# Altium PCB Top_board.PcbDoc (part 1 of 2)
Units mm, origin at the board's own origin, x right, y up, seen from the top; angles counter-clockwise.
Board outline 102 x 58.5 mm, 2 copper layers (Top Layer, Bottom Layer); 127 components, 87 nets, 328 pads, 86 vias.
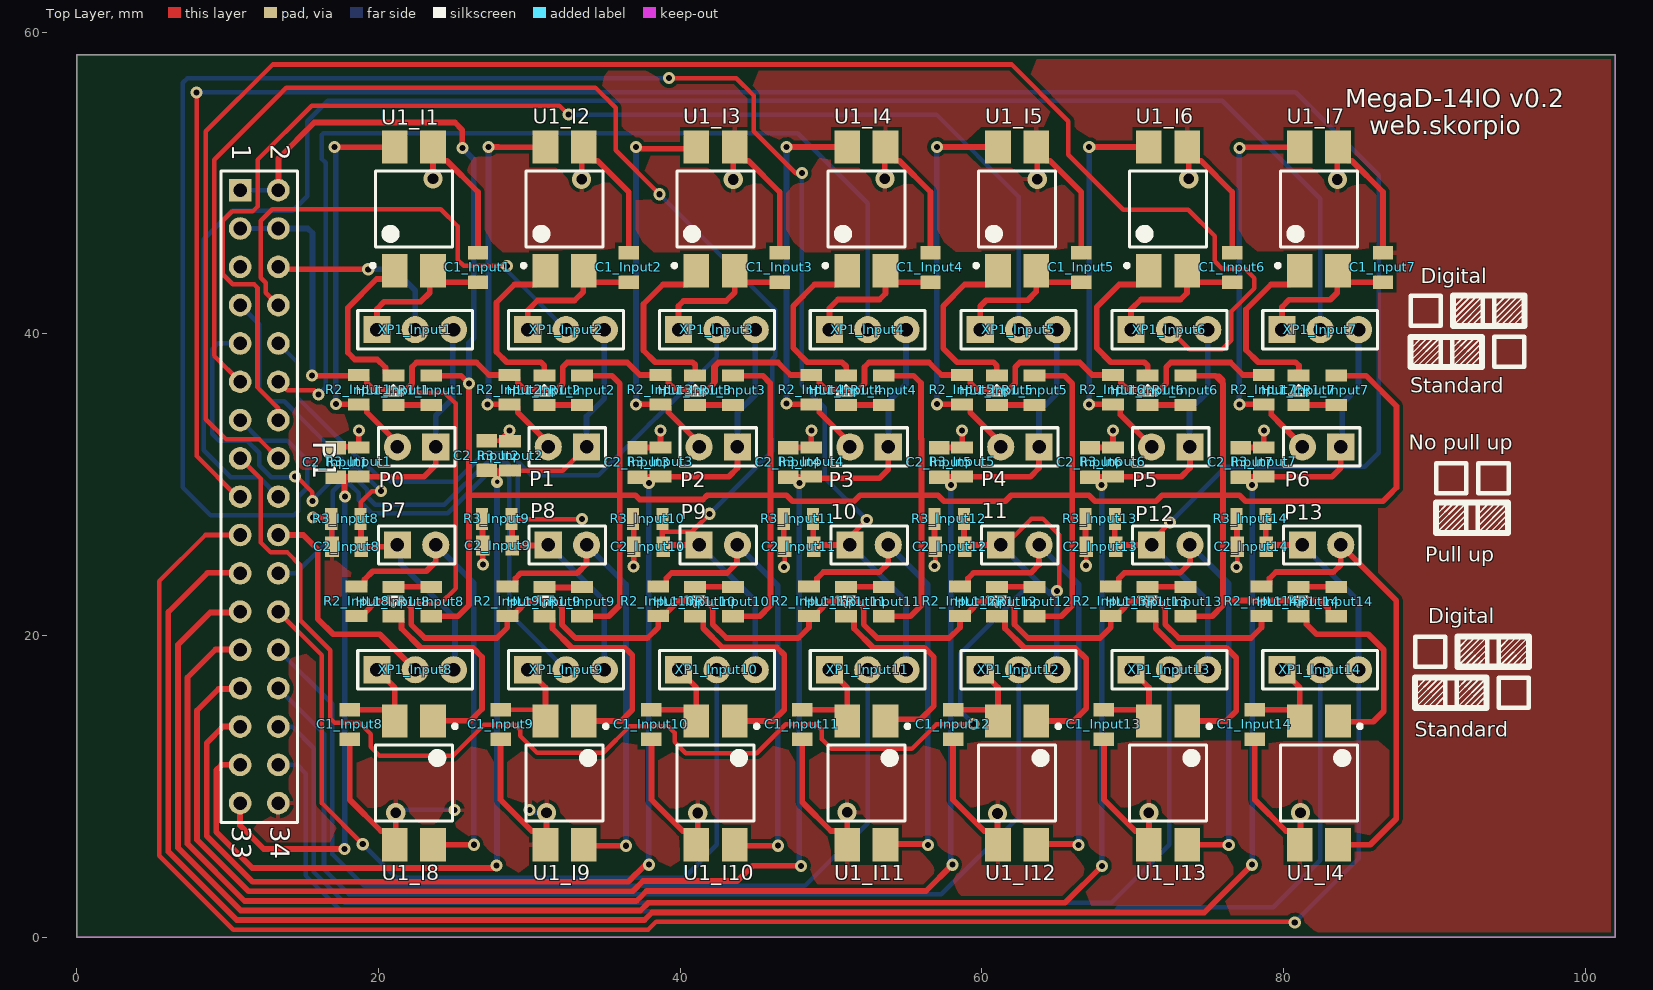
[diagram p0: Top Layer view]
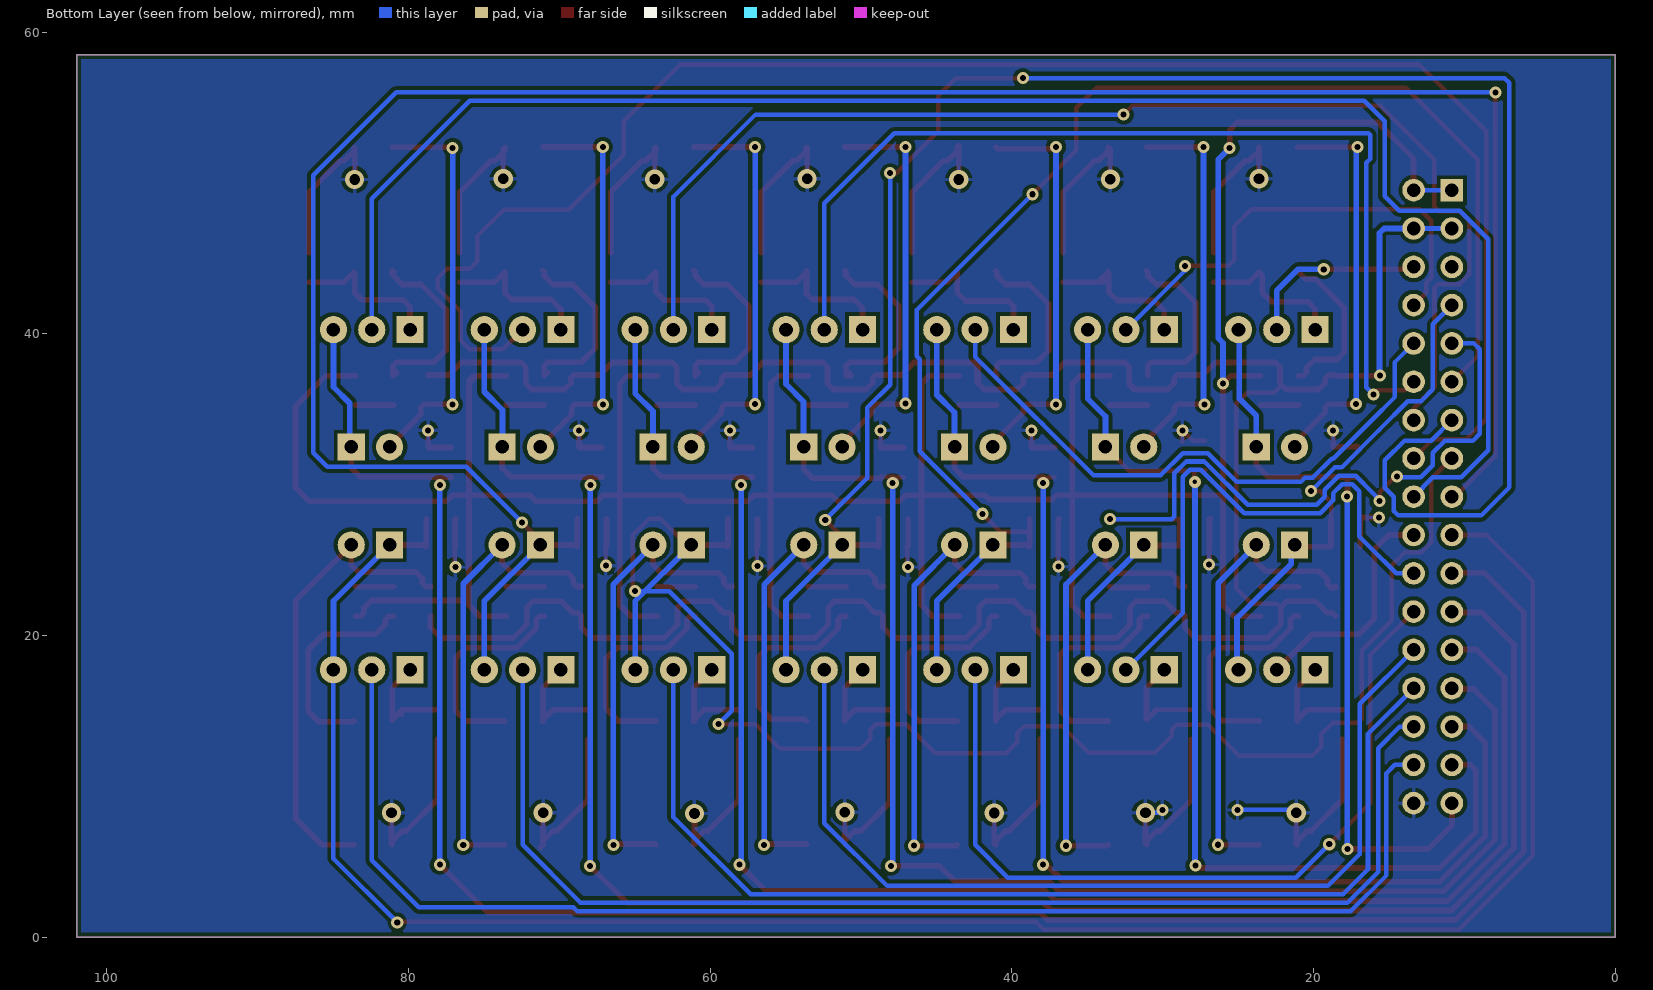
[diagram p1: Bottom Layer view, seen from below]

## Layer stack, top to bottom
Top Solder: solder mask 0.0102, Solder Resist, Dk 3.5
Top Layer: signal copper 0.0356
Dielectric 1: dielectric 0.32, FR-4, Dk 4.8
Bottom Layer: signal copper 0.0356
Bottom Solder: solder mask 0.0102, Solder Resist, Dk 3.5

## Board outline
0,0 0,58.5 102,58.5 102,0

## Design rules (kind name [scope] priority, off if disabled: settings)
Clearance [All] p1: gap=0.254 ignorepadtopadclearanceinfootprint=FALSE except(0: Arc-Hole Track-Hole SMDPad-Hole THPad-Hole Via-Hole Fill-Hole Poly-Hole Region-Hole Text-Hole)
MinimumSolderMaskSliver [All] p1 off: minsoldermaskwidth=0.254
PolygonConnect [All] p1: connectstyle=Relief reliefconductorwidth=0.254 reliefentries=4 polygonreliefangle="90 Angle" airgapwidth=0.254
RoutingVias [All] p1: holewidth=0.4 width=1 viastyle="Through Hole" minholewidth=0.2 minwidth=0.5 maxholewidth=0.8 maxwidth=1.27
SilkToSilkClearance [All] p1 off: silktosilkclearance=0.254
SilkToSolderMaskClearance [IsPad] p1 off: minsilkscreentomaskgap=0.254 clearancetoexposedcopper=TRUE
SolderMaskExpansion [All] p1 off: expansion=0.102
Width [All] p1: maxlimit=0.5 minlimit=0.254 preferedwidth=0.3 minimp=50.000000 maximp=50.000000 favimp=50.000000
Width +3.3 [InNet('+3.3')] p2: maxlimit=1 minlimit=0.5 preferedwidth=0.8 minimp=50.000000 maximp=50.000000 favimp=50.000000
Width GND [InNet('GND')] p3: maxlimit=1 minlimit=0.5 preferedwidth=0.8 minimp=50.000000 maximp=50.000000 favimp=50.000000
Width +12 [InNet('+12')] p4: maxlimit=1 minlimit=0.5 preferedwidth=0.8 minimp=50.000000 maximp=50.000000 favimp=50.000000
27 further rules are at their usual default settings.

## Classes and differential pairs
net class T[1..14]: T1 T2 T3 T4 T5 T6 T7 T8 T9 T10 T11 T12 T13 T14
channel class Input: Input1 Input2 Input3 Input4 Input5 Input6 Input7 Input8 Input9 Input10 Input11 Input12 Input13 Input14
net class P[1..14]: Input1 Input2 Input3 Input4 Input5 Input6 Input7 Input8 Input9 Input10 Input11 Input12 Input13 Input14 P1 P2 P3 P4 P5 P6 P7 P8 P9 P10 P11 P12 P13 P14
component class Top_board: Input1 P1
component class Input14: C1_Input14 C2_Input14 HL1_Input14 P13 R1_Input14 R2_Input14 R3_Input14 U1_I4 XP1_Input14
component class Input13: C1_Input13 C2_Input13 HL1_Input13 P12 R1_Input13 R2_Input13 R3_Input13 U1_I13 XP1_Input13
component class Input12: 11 C1_Input12 C2_Input12 HL1_Input12 R1_Input12 R2_Input12 R3_Input12 U1_I12 XP1_Input12
component class Input11: 10 C1_Input11 C2_Input11 HL1_Input11 R1_Input11 R2_Input11 R3_Input11 U1_I11 XP1_Input11
component class Input10: C1_Input10 C2_Input10 HL1_Input10 P9 R1_Input10 R2_Input10 R3_Input10 U1_I10 XP1_Input10
component class Input9: C1_Input9 C2_Input9 HL1_Input9 P8 R1_Input9 R2_Input9 R3_Input9 U1_I9 XP1_Input9
component class Input8: C1_Input8 C2_Input8 HL1_Input8 P7 R1_Input8 R2_Input8 R3_Input8 U1_I8 XP1_Input8
component class Input7: C1_Input7 C2_Input7 HL1_Input7 P6 R1_Input7 R2_Input7 R3_Input7 U1_I7 XP1_Input7
component class Input6: C1_Input6 C2_Input6 HL1_Input6 P5 R1_Input6 R2_Input6 R3_Input6 U1_I6 XP1_Input6
component class Input5: C1_Input5 C2_Input5 HL1_Input5 R1_Input5 R3_Input5
component class Input4: C2_Input4 HL1_Input4 R1_Input4 R2_Input4 R3_Input4
component class Input3: C1_Input3 C2_Input3 HL1_Input3 P2 R1_Input3 R2_Input3 R3_Input3 U1_I3 XP1_Input3
component class Input2: C1_Input2 C2_Input2 HL1_Input2 P1 R1_Input2 R2_Input2 R3_Input2 U1_I2 XP1_Input2
component class Input1: C1_Input1 C2_Input1 HL1_Input1 P0 R1_Input1 R2_Input1 R3_Input1 U1_I1

## Components (designator, comment, footprint, x,y, rotation, side; value= is the part's Value field where it differs from the comment)
10 "PLS-02" PLS-02 51.26,26 r0 top (schematic designator XP2)
11 "PLS-02" PLS-02 61.26,26 r0 top (schematic designator XP2)
C1_Input1 "CAP_SMD" CAP0805 26.6,44.4 r270 top (schematic designator C1)
C1_Input2 "CAP_SMD" CAP0805 36.6,44.4 r270 top (schematic designator C1)
C1_Input3 "CAP_SMD" CAP0805 46.6,44.4 r270 top (schematic designator C1)
C1_Input4 "CAP_SMD" CAP0805 56.6,44.4 r270 top (schematic designator C1)
C1_Input5 "CAP_SMD" CAP0805 66.6,44.4 r270 top (schematic designator C1)
C1_Input6 "CAP_SMD" CAP0805 76.6,44.4 r270 top (schematic designator C1)
C1_Input7 "CAP_SMD" CAP0805 86.6,44.4 r270 top (schematic designator C1)
C1_Input8 "CAP_SMD" CAP0805 18.1,14.1 r90 top (schematic designator C1)
C1_Input9 "CAP_SMD" CAP0805 28.1,14.1 r90 top (schematic designator C1)
C1_Input10 "CAP_SMD" CAP0805 38.1,14.105 r90 top (schematic designator C1)
C1_Input11 "CAP_SMD" CAP0805 48.1,14.1 r90 top (schematic designator C1)
C1_Input12 "CAP_SMD" CAP0805 58.1,14.1 r90 top (schematic designator C1)
C1_Input13 "CAP_SMD" CAP0805 68.1,14.1 r90 top (schematic designator C1)
C1_Input14 "CAP_SMD" CAP0805 78.1,14.1 r90 top (schematic designator C1)
C2_Input1 "CAP_SMD" CAP0805 17.175,31.475 r270 top (schematic designator C2)
C2_Input2 "CAP_SMD" CAP0805 27.175,31.925 r270 top (schematic designator C2)
C2_Input3 "CAP_SMD" CAP0805 37.175,31.475 r270 top (schematic designator C2)
C2_Input4 "CAP_SMD" CAP0805 47.175,31.475 r270 top (schematic designator C2)
C2_Input5 "CAP_SMD" CAP0805 57.175,31.475 r270 top (schematic designator C2)
C2_Input6 "CAP_SMD" CAP0805 67.175,31.475 r270 top (schematic designator C2)
C2_Input7 "CAP_SMD" CAP0805 77.175,31.475 r270 top (schematic designator C2)
C2_Input8 "CAP_SMD" CAP0805 17.9,25.875 r0 top (schematic designator C2)
C2_Input9 "CAP_SMD" CAP0805 27.9,25.96 r0 top (schematic designator C2)
C2_Input10 "CAP_SMD" CAP0805 37.9,25.875 r0 top (schematic designator C2)
C2_Input11 "CAP_SMD" CAP0805 47.9,25.875 r0 top (schematic designator C2)
C2_Input12 "CAP_SMD" CAP0805 57.9,25.875 r0 top (schematic designator C2)
C2_Input13 "CAP_SMD" CAP0805 67.9,25.875 r0 top (schematic designator C2)
C2_Input14 "CAP_SMD" CAP0805 77.9,25.875 r0 top (schematic designator C2)
HL1_Input1 "LED_SMD" 0805_LED 21,36.25 r90 top (schematic designator HL1)
HL1_Input2 "LED_SMD" 0805_LED 31,36.25 r90 top (schematic designator HL1)
HL1_Input3 "LED_SMD" 0805_LED 41,36.25 r90 top (schematic designator HL1)
HL1_Input4 "LED_SMD" 0805_LED 51,36.25 r90 top (schematic designator HL1)
HL1_Input5 "LED_SMD" 0805_LED 61,36.25 r90 top (schematic designator HL1)
HL1_Input6 "LED_SMD" 0805_LED 71,36.25 r90 top (schematic designator HL1)
HL1_Input7 "LED_SMD" 0805_LED 81,36.25 r90 top (schematic designator HL1)
HL1_Input8 "LED_SMD" 0805_LED 21,22.25 r270 top (schematic designator HL1)
HL1_Input9 "LED_SMD" 0805_LED 31,22.25 r270 top (schematic designator HL1)
HL1_Input10 "LED_SMD" 0805_LED 41,22.25 r270 top (schematic designator HL1)
HL1_Input11 "LED_SMD" 0805_LED 51,22.25 r270 top (schematic designator HL1)
HL1_Input12 "LED_SMD" 0805_LED 61,22.25 r270 top (schematic designator HL1)
HL1_Input13 "LED_SMD" 0805_LED 71,22.25 r270 top (schematic designator HL1)
HL1_Input14 "LED_SMD" 0805_LED 81,22.25 r270 top (schematic designator HL1)
P0 "PLS-02" PLS-02 23.8,32.5 r180 top (schematic designator XP2)
P1 "PLS-02" PLS-02 33.8,32.5 r180 top (schematic designator XP2)
P1 "Header 17X2" HDR2X17-PLC 12.1,29.2 r270 top locked
P2 "PLS-02" PLS-02 43.8,32.5 r180 top (schematic designator XP2)
P3 "PLS-02" PLS-02 53.8,32.5 r180 top (schematic designator XP2)
P4 "PLS-02" PLS-02 63.8,32.5 r180 top (schematic designator XP2)
P5 "PLS-02" PLS-02 73.8,32.5 r180 top (schematic designator XP2)
P6 "PLS-02" PLS-02 83.8,32.5 r180 top (schematic designator XP2)
P7 "PLS-02" PLS-02 21.26,26 r0 top (schematic designator XP2)
P8 "PLS-02" PLS-02 31.26,26 r0 top (schematic designator XP2)
P9 "PLS-02" PLS-02 41.26,26 r0 top (schematic designator XP2)
P12 "PLS-02" PLS-02 71.26,26 r0 top (schematic designator XP2)
P13 "PLS-02" PLS-02 81.26,26 r0 top (schematic designator XP2)
R1_Input1 "RES_SMD" RES0805 23.5,36.25 r270 top (schematic designator R1)
R1_Input2 "RES_SMD" RES0805 33.5,36.25 r270 top (schematic designator R1)
R1_Input3 "RES_SMD" RES0805 43.5,36.25 r270 top (schematic designator R1)
R1_Input4 "RES_SMD" RES0805 53.5,36.25 r270 top (schematic designator R1)
R1_Input5 "RES_SMD" RES0805 63.5,36.25 r270 top (schematic designator R1)
R1_Input6 "RES_SMD" RES0805 73.5,36.25 r270 top (schematic designator R1)
R1_Input7 "RES_SMD" RES0805 83.5,36.25 r270 top (schematic designator R1)
R1_Input8 "RES_SMD" RES0805 23.5,22.25 r90 top (schematic designator R1)
R1_Input9 "RES_SMD" RES0805 33.5,22.25 r90 top (schematic designator R1)
R1_Input10 "RES_SMD" RES0805 43.5,22.25 r90 top (schematic designator R1)
R1_Input11 "RES_SMD" RES0805 53.5,22.25 r90 top (schematic designator R1)
R1_Input12 "RES_SMD" RES0805 63.5,22.25 r90 top (schematic designator R1)
R1_Input13 "RES_SMD" RES0805 73.5,22.25 r90 top (schematic designator R1)
R1_Input14 "RES_SMD" RES0805 83.5,22.25 r90 top (schematic designator R1)
R2_Input1 "RES_SMD" RES0805 18.7,36.3 r270 top (schematic designator R2)
R2_Input2 "RES_SMD" RES0805 28.7,36.3 r270 top (schematic designator R2)
R2_Input3 "RES_SMD" RES0805 38.7,36.3 r270 top (schematic designator R2)
R2_Input4 "RES_SMD" RES0805 48.7,36.3 r270 top (schematic designator R2)
R2_Input5 "RES_SMD" RES0805 58.7,36.3 r270 top (schematic designator R2)
R2_Input6 "RES_SMD" RES0805 68.7,36.3 r270 top (schematic designator R2)
R2_Input7 "RES_SMD" RES0805 78.7,36.3 r270 top (schematic designator R2)
R2_Input8 "RES_SMD" RES0805 18.55,22.275 r90 top (schematic designator R2)
R2_Input9 "RES_SMD" RES0805 28.55,22.275 r90 top (schematic designator R2)
R2_Input10 "RES_SMD" RES0805 38.55,22.275 r90 top (schematic designator R2)
R2_Input11 "RES_SMD" RES0805 48.55,22.275 r90 top (schematic designator R2)
R2_Input12 "RES_SMD" RES0805 58.55,22.275 r90 top (schematic designator R2)
R2_Input13 "RES_SMD" RES0805 68.55,22.275 r90 top (schematic designator R2)
R2_Input14 "RES_SMD" RES0805 78.55,22.275 r90 top (schematic designator R2)
R3_Input1 "RES_SMD" RES0805 18.7,31.5 r270 top (schematic designator R3)
R3_Input2 "RES_SMD" RES0805 28.725,31.9 r270 top (schematic designator R3)
R3_Input3 "RES_SMD" RES0805 38.7,31.5 r270 top (schematic designator R3)
R3_Input4 "RES_SMD" RES0805 48.7,31.5 r270 top (schematic designator R3)
R3_Input5 "RES_SMD" RES0805 58.7,31.5 r270 top (schematic designator R3)
R3_Input6 "RES_SMD" RES0805 68.7,31.5 r270 top (schematic designator R3)
R3_Input7 "RES_SMD" RES0805 78.7,31.5 r270 top (schematic designator R3)
R3_Input8 "RES_SMD" RES0805 17.85,27.725 r0 top (schematic designator R3)
R3_Input9 "RES_SMD" RES0805 27.85,27.725 r0 top (schematic designator R3)
R3_Input10 "RES_SMD" RES0805 37.85,27.725 r0 top (schematic designator R3)
R3_Input11 "RES_SMD" RES0805 47.85,27.725 r0 top (schematic designator R3)
R3_Input12 "RES_SMD" RES0805 57.85,27.725 r0 top (schematic designator R3)
R3_Input13 "RES_SMD" RES0805 67.85,27.725 r0 top (schematic designator R3)
R3_Input14 "RES_SMD" RES0805 77.85,27.725 r0 top (schematic designator R3)
U1_I1 "PC817" "DIP-4 - SMT" 22.35,48.275 r90 top (schematic designator U1)
U1_I2 "PC817" "DIP-4 - SMT" 32.35,48.275 r90 top locked (schematic designator U1)
U1_I3 "PC817" "DIP-4 - SMT" 42.35,48.275 r90 top (schematic designator U1)
U1_I4 "PC817" "DIP-4 - SMT" 82.35,10.227 r270 top (schematic designator U1)
U1_I4 "PC817" "DIP-4 - SMT" 52.35,48.275 r90 top (schematic designator U1)
U1_I5 "PC817" "DIP-4 - SMT" 62.35,48.275 r90 top (schematic designator U1)
U1_I6 "PC817" "DIP-4 - SMT" 72.35,48.275 r90 top (schematic designator U1)
U1_I7 "PC817" "DIP-4 - SMT" 82.35,48.275 r90 top (schematic designator U1)
U1_I8 "PC817" "DIP-4 - SMT" 22.35,10.227 r270 top (schematic designator U1)
U1_I9 "PC817" "DIP-4 - SMT" 32.35,10.225 r270 top (schematic designator U1)
U1_I10 "PC817" "DIP-4 - SMT" 42.35,10.227 r270 top (schematic designator U1)
U1_I11 "PC817" "DIP-4 - SMT" 52.35,10.227 r270 top (schematic designator U1)
U1_I12 "PC817" "DIP-4 - SMT" 62.35,10.227 r270 top (schematic designator U1)
U1_I13 "PC817" "DIP-4 - SMT" 72.35,10.227 r270 top (schematic designator U1)
XP1_Input1 "PLS-03" PLS-03 19.9,40.275 r0 top (schematic designator XP1)
XP1_Input2 "PLS-03" PLS-03 29.9,40.275 r0 top (schematic designator XP1)
XP1_Input3 "PLS-03" PLS-03 39.9,40.275 r0 top (schematic designator XP1)
XP1_Input4 "PLS-03" PLS-03 49.9,40.275 r0 top (schematic designator XP1)
XP1_Input5 "PLS-03" PLS-03 59.9,40.275 r0 top (schematic designator XP1)
XP1_Input6 "PLS-03" PLS-03 69.9,40.275 r0 top (schematic designator XP1)
XP1_Input7 "PLS-03" PLS-03 79.9,40.275 r0 top (schematic designator XP1)
XP1_Input8 "PLS-03" PLS-03 19.9,17.725 r0 top (schematic designator XP1)
XP1_Input9 "PLS-03" PLS-03 29.9,17.725 r0 top (schematic designator XP1)
XP1_Input10 "PLS-03" PLS-03 39.9,17.725 r0 top (schematic designator XP1)
XP1_Input11 "PLS-03" PLS-03 49.9,17.725 r0 top (schematic designator XP1)
XP1_Input12 "PLS-03" PLS-03 59.9,17.725 r0 top (schematic designator XP1)
XP1_Input13 "PLS-03" PLS-03 69.9,17.725 r0 top (schematic designator XP1)
XP1_Input14 "PLS-03" PLS-03 79.9,17.725 r0 top (schematic designator XP1)

## Footprints (in the part's own frame and the unit in brackets; to place one, negate y for a bottom-side part, rotate by r counter-clockwise, add the part's x,y. Pads: shape width x height; smd on the part's side, far side on the other; paste and mask are expansions set on the pad)
0805_LED [mm] "LED, 2-Leads, Body 2,00x1,20mm, IPC Medium Density"
  rect 0.8x1.45 smd: 1(-0.975,0) 2(0.975,0)
  silkscreen extent -0.3,-0.6 0.3,0.6, body extent -1,-0.6 1,0.6, height 0.6
CAP0805 [mm] "Chip Capacitor, 2-Leads, Body 2,00x1,20mm, IPC Medium Density"
  rect 0.9x1.35 smd: 1(-0.975,0) 2(0.975,0)
  body extent -1,-0.6 1,0.6, height 0.4
"DIP-4 - SMT" [mm] "DIP; 4 Leads; Row Spacing 7.62 mm; Pitch 2.54 mm"
  rect 2.2x1.7 smd: 1(-4.1,1.27) 2(-4.1,-1.27) 3(4.1,-1.27) 4(4.1,1.27)
  silkscreen extent -3.87,-2.55 2.52,2.85, body extent -4.93,-2.29 5.07,8.9, height 3.85
HDR2X17-PLC [mm] "Connector; Header; 17x2 Position"
  rect 1.5x1.5 hole 0.9: 1(-20.32,-1.27)
  round 1.5 hole 0.9: 2(-20.32,1.27) 3(-17.78,-1.27) 4(-17.78,1.27) 5(-15.24,-1.27) 6(-15.24,1.27) 7(-12.7,-1.27) 8(-12.7,1.27) 9(-10.16,-1.27) 10(-10.16,1.27) 11(-7.62,-1.27) 12(-7.62,1.27) 13(-5.08,-1.27) 14(-5.08,1.27) 15(-2.54,-1.27) 16(-2.54,1.27) 17(0,-1.27) 18(0,1.27) 19(2.54,-1.27) 20(2.54,1.27) 21(5.08,-1.27) 22(5.08,1.27) 23(7.62,-1.27) 24(7.62,1.27) 25(10.16,-1.27) 26(10.16,1.27) 27(12.7,-1.27) 28(12.7,1.27) 29(15.24,-1.27) 30(15.24,1.27) 31(17.78,-1.27) 32(17.78,1.27) 33(20.32,-1.27) 34(20.32,1.27)
  silkscreen extent -21.59,-2.54 21.59,2.54, body extent -21.59,-2.54 21.59,2.54, height 8.6
PLS-02 [mm]
  rect 1.8x1.8 hole 0.9: 1(0,0)
  round 1.8 hole 0.9: 2(2.54,0)
  silkscreen extent -1.27,-1.27 3.81,1.27, body extent -1.27,-1.27 3.81,1.27, height 8.6
PLS-03 [mm]
  rect 1.8x1.8 hole 0.9: 1(0,0)
  round 1.8 hole 0.9: 2(2.54,0) 3(5.08,0)
  silkscreen extent -1.27,-1.27 6.35,1.27, body extent -1.27,-1.27 6.35,1.27, height 8.6
RES0805 [mm] "Chip Resistor, 2-Leads, Body 2,00x1,20mm, IPC Medium Density"
  rect 0.8x1.45 smd: 1(-0.975,0) 2(0.975,0)
  body extent -1,-0.6 1,0.6, height 0.4

## Part data
C1_Input1 C1_Input2 C1_Input3 C1_Input4 C1_Input5 C1_Input6 C1_Input7 C1_Input8 C1_Input9 C1_Input10 C1_Input11 C1_Input12 C1_Input13 C1_Input14 C2_Input1 C2_Input2 C2_Input3 C2_Input4 C2_Input5 C2_Input6 C2_Input7 C2_Input8 C2_Input9 C2_Input10 C2_Input11 C2_Input12 C2_Input13 C2_Input14: "Ceramic capacitor, 0805", Val=100nF
HL1_Input1 HL1_Input2 HL1_Input3 HL1_Input4 HL1_Input5 HL1_Input6 HL1_Input7 HL1_Input8 HL1_Input9 HL1_Input10 HL1_Input11 HL1_Input12 HL1_Input13 HL1_Input14: "0805 led"
P1: "Header, 17-Pin, Dual row", LatestRevisionDate=17-Jul-2002, LatestRevisionNote="Re-released for DXP Platform.", Publisher="Altium Limited"
U1_I1 U1_I2 U1_I3 U1_I4 U1_I4 U1_I5 U1_I6 U1_I7 U1_I8 U1_I9 U1_I10 U1_I11 U1_I12 U1_I13: "4-Pin Phototransistor Optocoupler", DatasheetVersion=Nov-2003, LatestRevisionDate=04-Mar-2005, LatestRevisionNote="Sch pins 3 & 4 Swapped.", PackageReference=DIP-4, Published=24-Mar-1999, Publisher="Altium Limited"
R1_Input1 R1_Input2 R1_Input3 R1_Input4 R1_Input5 R1_Input6 R1_Input7 R1_Input8 R1_Input9 R1_Input10 R1_Input11 R1_Input12 R1_Input13 R1_Input14: Val=750
R2_Input1 R2_Input2 R2_Input3 R2_Input4 R2_Input5 R2_Input6 R2_Input7 R2_Input8 R2_Input9 R2_Input10 R2_Input11 R2_Input12 R2_Input13 R2_Input14: Val=1K
R3_Input1 R3_Input2 R3_Input3 R3_Input4 R3_Input5 R3_Input6 R3_Input7 R3_Input8 R3_Input9 R3_Input10 R3_Input11 R3_Input12 R3_Input13 R3_Input14: Val=N/C

## Via types
v1: diameter 0.8, hole 0.4, Top Layer to Bottom Layer, tented both sides, 71 vias
v2: diameter 1.27, hole 0.711, Top Layer to Bottom Layer, tented both sides, 14 vias
v3: diameter 0.8, hole 0.3, Top Layer to Bottom Layer, tented both sides, 1 vias

## Nets (pads, with @x,y where several pads share a name; then routed paths per layer and width w, separated by ;. In a path a pad name is that pad's centre, name@x,y a point inside that pad or via, vN(x,y) a via of type N, cw(c..) or ccw(c..) an arc to the next point about the centre after c; other vN are vias at no path point)
+3.3: P1.3 P1.4 R2_Input1.1 R2_Input2.1 R2_Input3.1 R2_Input4.1 R2_Input5.1 R2_Input6.1 R2_Input7.1 R2_Input8.1 R2_Input9.1 R2_Input10.1 R2_Input11.1 R2_Input12.1 R2_Input13.1 R2_Input14.1 | length 251
  Top Layer w0.3: 25.388,19.825 23.075,19.825 23.018,19.825 22.174,20.669 ; 26.5,38.1 22.525,38.1 22.479,38.1 22.225,37.846 22.225,37.8 22.225,36.696 22.225,36.474 22.606,36.093 24.409,36.093 25.121,35.382 25.121,23.114 24.105,22.098 22.428,22.098 22.174,21.844 ; 31.953,36.297 32.233,36.576 ; 35.573,19.825 33.075,19.825 33.018,19.825 32.131,20.712 32.131,21.895 ; 36.5,38.1 32.525,38.1 32.487,38.1 32.233,37.846 ; 41.834,36.297 42.367,36.83 42.367,37.846 42.621,38.1 46.495,38.1 47.32,37.275 47.325,37.275 R2_Input4.1@48.7,37.275 ; 41.885,22.098 42.139,21.844 42.139,20.709 43.018,19.83 43.075,19.83 46.384,19.83 ; 22.174,20.669 22.174,21.844 ; 22.174,20.669 22.174,21.844 ; 32.131,21.895 31.75,22.276 32.131,21.895 ; 32.233,36.576 32.233,37.846 ; 32.233,36.576 32.233,37.846
  Top Layer w0.381: v1(15.6,37.225) 18.65,37.225 R2_Input1.1@18.7,37.275 19.025,37.275 19.235,37.066 19.235,36.74 19.675,36.3 21.829,36.3 22.225,36.696 22.225,37.8 22.525,38.1 26.5,38.1 27.325,37.275 R2_Input2.1@28.7,37.275 29.025,37.275 29.234,37.066 29.234,36.74 29.675,36.3 31.829,36.3 32.225,36.696 32.225,37.8 ; R2_Input8.1@18.55,21.3 18.76,21.509 19.109,21.509 19.875,22.275 21.754,22.275 22.169,21.859 22.169,20.731 ; R2_Input14.1@78.55,21.3 78.55,20.525 77.85,19.825 73.075,19.825 72.169,20.731 72.169,21.859 71.754,22.275 69.875,22.275 69.109,21.509 68.76,21.509 R2_Input13.1@68.55,21.3 68.55,20.525 67.85,19.825 63.075,19.825 62.169,20.731 62.169,21.859 61.754,22.275 59.875,22.275 59.11,21.509 58.759,21.509 R2_Input12.1@58.55,21.3 58.55,20.525 57.85,19.825 53.075,19.825 52.17,20.731 52.17,21.859 51.754,22.275 49.875,22.275 49.109,21.509 48.76,21.509 R2_Input11.1@48.55,21.3 48.55,20.525 47.85,19.825 47.845,19.83 ; R2_Input7.1@78.7,37.275 77.325,37.275 76.5,38.1 72.525,38.1 72.225,37.8 72.225,36.696 71.829,36.3 69.675,36.3 69.234,36.74 69.234,37.066 69.025,37.275 R2_Input6.1@68.7,37.275 67.325,37.275 66.5,38.1 62.525,38.1 62.225,37.8 62.225,36.696 61.829,36.3 59.675,36.3 59.234,36.74 59.234,37.066 59.025,37.275 R2_Input5.1@58.7,37.275 57.325,37.275 56.5,38.1 52.525,38.1 52.225,37.8 52.225,36.696 51.829,36.3 49.675,36.3 49.234,36.74 49.234,37.066 49.025,37.275 R2_Input4.1@48.7,37.275 47.325,37.275 46.5,38.1 ; 22.169,20.731 23.075,19.825 ; 22.169,20.731 23.075,19.825 ; 23.075,19.825 27.85,19.825 ; 23.075,19.825 27.85,19.825 ; 27.85,19.825 28.55,20.525 R2_Input9.1@28.55,21.3 28.76,21.509 29.11,21.509 29.875,22.275 ; 29.875,22.275 31.754,22.275 ; 29.875,22.275 31.754,22.275 ; 31.754,22.275 32.17,21.859 32.17,20.731 33.075,19.825 ; 32.225,37.8 32.525,38.1 ; 32.225,37.8 32.525,38.1 ; 32.525,38.1 36.5,38.1 37.325,37.275 R2_Input3.1@38.7,37.275 39.025,37.275 39.234,37.066 39.234,36.74 39.675,36.3 41.829,36.3 42.225,36.696 42.225,37.8 42.525,38.1 ; 33.075,19.825 37.845,19.825 ; 33.075,19.825 37.845,19.825 ; 37.845,19.825 38.55,20.53 R2_Input10.1@38.55,21.3 38.55,21.305 38.759,21.515 39.109,21.515 39.875,22.28 41.754,22.28 42.169,21.864 42.169,20.735 43.075,19.83 ; 42.525,38.1 46.5,38.1 ; 42.525,38.1 46.5,38.1 ; 43.075,19.83 47.845,19.83 ; 43.075,19.83 47.845,19.83
  Bottom Layer w0.3: P1.3@10.83,46.98 P1.4@13.37,46.98
  Bottom Layer w0.381: P1.4@13.37,46.98 15.32,46.98 15.625,46.675 15.625,37.25 v1(15.6,37.225)
+12: P1.1@10.83,49.52 P1.2@13.37,49.52 R1_Input1.1 R1_Input2.1 R1_Input3.1 R1_Input4.1 R1_Input5.1 R1_Input6.1 R1_Input7.1 R1_Input8.1 R1_Input9.1 R1_Input10.1 R1_Input11.1 R1_Input12.1 R1_Input13.1 R1_Input14.1 | length 258.6
  Top Layer w0.3: R1_Input5.1@63.5,37.225 65.475,37.225 65.478,37.225 66,36.703 66,36.7 66,29.3 66,29.2 ; R1_Input6.1@73.5,37.225 75.475,37.225 75.743,37.225 76,36.968 76,33 76,29.3 76,29.2
  Top Layer w0.381: P1.2@13.37,49.52 13.37,51.62 15.75,54 25.075,54 25.562,53.513 v1(25.562,52.325) ; R1_Input8.1@23.5,21.275 25.275,21.275 26,22 26,29.3 ; R1_Input1.1@23.5,37.225 25.475,37.225 v1(26,36.7) 26,29.3 ; R1_Input9.1@33.5,21.275 35.275,21.275 36,22 36,29.3 ; R1_Input2.1@33.5,37.225 35.475,37.225 35.996,36.704 35.996,33.005 36,33 36,29.3 ; R1_Input10.1@43.5,21.28 45.275,21.28 46,22.005 46,29.3 ; R1_Input3.1@43.5,37.225 45.475,37.225 45.981,36.72 45.981,33.019 46,33 46,29.3 ; R1_Input11.1@53.5,21.275 55.275,21.275 56,22 56,29.3 ; R1_Input4.1@53.5,37.225 55.475,37.225 55.965,36.734 55.965,33.034 56,33 56,29.3 ; R1_Input12.1@63.5,21.275 65.275,21.275 66,22 66,29.2 ; R1_Input5.1@63.5,37.225 65.475,37.225 66,36.7 66,29.3 ; R1_Input13.1@73.5,21.275 75.275,21.275 76,22 76,22.275 ; R1_Input6.1@73.5,37.225 75.475,37.225 75.995,36.705 75.995,33.005 76,33 76,29.3 ; 76,29.2 76,22.275 ; R1_Input14.1@83.5,21.275 83.175,21.275 82.965,21.484 82.965,21.81 82.45,22.325 76.05,22.325 76,22.275 ; R1_Input7.1@83.5,37.225 85.475,37.225 87.5,35.2 87.5,29.8 87,29.3 86.597,28.897 77.482,28.897 77.079,29.3 76,29.3 ; 26,29.3 27.45,29.3 27.453,29.297 28.347,29.297 28.35,29.3 36,29.3 ; 36,29.3 37.046,29.3 37.326,29.021 41.523,29.021 41.803,29.3 46,29.3 ; 46,29.3 47.052,29.3 47.455,28.897 51.526,28.897 51.929,29.3 56,29.3 ; 56,29.3 57.103,29.3 57.506,28.897 61.551,28.897 61.954,29.3 66,29.3 ; 66,29.3 67.103,29.3 67.506,28.897 71.552,28.897 71.955,29.3 76,29.3
  Bottom Layer w0.3: P1.1@10.83,49.52 P1.2@13.37,49.52
  Bottom Layer w0.381: v1(25.562,52.325) 26.325,51.563 26.325,39.718 26,39.394 v1(26,36.7)
GND: C1_Input1.1 C1_Input2.1 C1_Input3.1 C1_Input4.1 C1_Input5.1 C1_Input6.1 C1_Input7.1 C1_Input8.1 C1_Input9.1 C1_Input10.1 C1_Input11.1 C1_Input12.1 C1_Input13.1 C1_Input14.1 C2_Input1.1 C2_Input2.1 C2_Input3.1 C2_Input4.1 C2_Input5.1 C2_Input6.1 C2_Input7.1 C2_Input8.1 C2_Input9.1 C2_Input10.1 C2_Input11.1 C2_Input12.1 C2_Input13.1 C2_Input14.1 P1.34 R3_Input1.1 R3_Input2.1 R3_Input3.1 R3_Input4.1 R3_Input5.1 R3_Input6.1 R3_Input7.1 R3_Input8.1 R3_Input9.1 R3_Input10.1 R3_Input11.1 R3_Input12.1 R3_Input13.1 R3_Input14.1 U1_I1.3 U1_I2.3 U1_I3.3 U1_I4.3 U1_I5.3 U1_I6.3 U1_I7.3 U1_I8.3 U1_I9.3 U1_I10.3 U1_I11.3 U1_I12.3 U1_I13.3 | length 214.8
  Top Layer w0.3: C2_Input1.1@17.071,32.571 C2_Input1.1@17.154,32.571 ; C2_Input2.1@27.175,32.9 R3_Input2.1@28,32.9 ; v1(46.9,24.54) 46.925,24.565 C2_Input11.1@46.925,25.875 ; v2(51.075,8.275) v2@51.08,8.27 ; v1(56.88,24.6) 56.925,24.645 C2_Input12.1@56.925,25.875 ; v1(66.925,24.623) C2_Input13.1@66.925,25.875 ; v1(76.9,24.54) 76.925,24.565 C2_Input14.1@76.925,25.875 ; U1_I7.3@83.62,52.375 83.62,52.125 U1_I7.3@83.62,52.08 ; R3_Input2.1@28,32.9 v1(28.7,33.6) R3_Input2.1@28,32.9 ; v2@51.08,8.27 U1_I11.3@51.08,6.127 v2@51.08,8.27 ; U1_I7.3@83.62,52.08 83.575,52.08 U1_I7.3@83.62,52.08
  Top Layer w0.381: v1(15.675,27.825) 16.775,27.825 R3_Input8.1@16.875,27.725 R3_Input8.1@16.9,27.7 ; C2_Input1.1@17.175,32.45 17.175,32.55 17.213,32.513 18.662,32.513 R3_Input1.1@18.7,32.475 v1(18.7,33.6) ; C1_Input8.1@18.1,13.125 18.1,9.107 20.17,7.037 20.421,7.037 21.08,6.377 U1_I8.3@21.08,6.127 21.15,6.197 v2(21.15,8.25) ; v2(23.62,50.28) U1_I1.3@23.62,52.125 ; U1_I1.3@23.62,52.375 U1_I1.3@23.62,52.125 ; C1_Input1.1@26.6,45.375 26.6,49.395 24.53,51.465 24.28,51.465 U1_I1.3@23.62,52.125 ; R3_Input9.1@26.875,27.725 26.9,27.7 26.9,25.985 C2_Input9.1@26.925,25.96 v1(26.925,24.7) ; C1_Input9.1@28.1,13.125 28.1,9.107 30.17,7.037 30.42,7.037 U1_I9.3@31.08,6.377 ; U1_I9.3@31.08,6.375 U1_I9.3@31.08,6.125 31.15,6.195 31.15,6.375 v2(31.15,8.248) ; v2(33.475,50.25) 33.475,52.23 U1_I2.3@33.62,52.375 33.62,52.125 34.279,51.465 34.53,51.465 36.6,49.395 C1_Input2.1@36.6,45.375 ; R3_Input10.1@36.875,27.725 36.925,27.675 C2_Input10.1@36.925,25.875 36.923,25.872 36.923,24.563 v1(36.92,24.56) ; C2_Input3.1@37.175,32.45 37.187,32.463 38.688,32.463 R3_Input3.1@38.7,32.475 v1(38.7,33.6) ; C1_Input10.1@38.1,13.13 38.1,9.112 40.171,7.041 40.42,7.041 41.08,6.382 41.08,6.132 U1_I10.3@41.08,6.127 41.175,6.222 v2(41.175,8.225) ; C1_Input3.1@46.6,45.375 46.6,49.395 44.53,51.465 44.279,51.465 43.62,52.125 U1_I3.3@43.62,52.375 U1_I3.3@43.525,52.47 ; R3_Input11.1@46.875,27.725 46.875,25.925 C2_Input11.1@46.925,25.875 ; C2_Input4.1@47.175,32.45 47.188,32.463 48.687,32.463 R3_Input4.1@48.7,32.475 v1(48.7,33.6) ; C1_Input11.1@48.1,13.125 48.1,8.947 50.01,7.037 50.421,7.037 U1_I11.3@51,6.457 ; v2(51.075,8.275) U1_I11.3@51.075,6.632 ; v2(53.575,50.275) 53.575,52.33 U1_I4.3@53.62,52.375 53.62,52.125 54.279,51.465 54.53,51.465 56.6,49.395 C1_Input4.1@56.6,45.375 ; R3_Input12.1@56.875,27.725 56.875,25.925 C2_Input12.1@56.925,25.875 ; C2_Input5.1@57.175,32.45 57.187,32.463 58.688,32.463 R3_Input5.1@58.7,32.475 v1(58.7,33.6) ; C1_Input12.1@58.1,13.125 58.1,9.107 60.17,7.037 U1_I12.3@60.421,7.037 ; C1_Input5.1@66.6,45.375 66.6,49.395 64.53,51.465 U1_I5.3@64.279,51.465 ; R3_Input13.1@66.875,27.725 66.875,25.925 C2_Input13.1@66.925,25.875 ; C2_Input6.1@67.175,32.45 67.188,32.463 68.687,32.463 R3_Input6.1@68.7,32.475 ; C1_Input13.1@68.1,13.125 68.1,9.107 70.17,7.037 70.421,7.037 U1_I13.3@71.08,6.377 ; R3_Input6.1@68.7,32.475 v1(68.7,33.6) ; v2(71.08,8.25) U1_I13.3@71.08,6.377 ; U1_I13.3@71.26,5.947 U1_I13.3@71.08,6.127 U1_I13.3@71.08,6.377 ; C1_Input6.1@76.6,45.375 76.6,49.395 74.53,51.465 U1_I6.3@74.28,51.465 ; R3_Input14.1@76.875,27.725 76.925,27.675 C2_Input14.1@76.925,25.875 ; C2_Input7.1@77.175,32.45 77.188,32.463 78.688,32.463 R3_Input7.1@78.7,32.475 v1(78.7,33.6) ; C1_Input14.1@78.1,13.125 78.1,9.107 80.17,7.037 80.421,7.037 81.08,6.377 U1_I4.3@81.08,6.127 81.125,6.172 v2(81.125,8.25) ; U1_I7.3@83.575,52.08 U1_I7.3@83.62,52.125 ; C1_Input7.1@86.6,45.375 86.6,49.395 84.53,51.465 84.279,51.465 U1_I7.3@83.62,52.125 ; R3_Input8.1@16.9,27.7 16.9,25.875 R3_Input8.1@16.9,27.7 ; U1_I3.3@43.525,52.47 v2(43.525,50.225) U1_I3.3@43.525,52.47 ; U1_I11.3@51,6.457 U1_I11.3@51.125,6.582 ; U1_I11.3@51,6.457 U1_I11.3@51.125,6.582 ; U1_I11.3@51.075,6.632 U1_I11.3@51.125,6.582 ; U1_I11.3@51.075,6.632 U1_I11.3@51.125,6.582 ; U1_I12.3@60.421,7.037 U1_I12.3@61.08,6.377 ; U1_I12.3@60.421,7.037 U1_I12.3@61.08,6.377 ; U1_I12.3@61.05,6.157 v2(61.05,8.2) U1_I12.3@61.05,6.157 ; U1_I12.3@61.05,6.157 U1_I12.3@61.08,6.127 U1_I12.3@61.08,6.377 ; U1_I5.3@63.62,52.125 U1_I5.3@64.279,51.465 ; U1_I5.3@63.62,52.125 U1_I5.3@64.279,51.465 ; U1_I5.3@63.62,52.125 U1_I5.3@63.62,52.375 U1_I5.3@63.675,52.32 ; U1_I5.3@63.675,52.32 v2(63.675,50.25) U1_I5.3@63.675,52.32 ; U1_I6.3@73.6,52.355 U1_I6.3@73.725,52.23 ; U1_I6.3@73.6,52.355 U1_I6.3@73.725,52.23 ; U1_I6.3@73.6,52.355 U1_I6.3@73.62,52.375 ; U1_I6.3@73.62,52.125 U1_I6.3@74.28,51.465 ; U1_I6.3@73.62,52.125 U1_I6.3@73.62,52.375 ; U1_I6.3@73.62,52.125 U1_I6.3@73.62,52.375 ; U1_I6.3@73.62,52.125 U1_I6.3@74.28,51.465 ; U1_I6.3@73.725,52.23 v2(73.725,50.275) U1_I6.3@73.725,52.23 ; U1_I7.3@83.57,52.325 83.57,50.175 U1_I7.3@83.57,52.325 ; U1_I7.3@83.57,52.325 U1_I7.3@83.62,52.125 ; R3_Input2.1@28.7,32.875 v1(28.7,33.6) R3_Input2.1@28.7,32.875
  Bottom Layer w0.3: v2(21.15,8.25) 21.333,8.433 v1(25.044,8.433) ; v1(30.023,8.433) 30.206,8.25 v2@31.15,8.25
  other v2: 83.575,50.225
NetC1_Input1_2: C1_Input1.2 U1_I1.2 XP1_Input1.1 | length 13.5
  Top Layer w0.3: 25.464,43.425 C1_Input1.2@26.6,43.425
  Top Layer w0.381: XP1_Input1.1@19.9,40.275 19.9,41.65 20.375,42.125 22.8,42.125 23.402,42.727 23.402,43.866 23.62,44.084 U1_I1.2@24.28,43.425 ; U1_I1.2@24.28,43.425 C1_Input1.2@26.6,43.425 U1_I1.2@24.28,43.425
NetC1_Input2_2: C1_Input2.2 U1_I2.2 XP1_Input2.1 | length 14.4
  Top Layer w0.3: U1_I2.2@33.62,44.175 33.62,44.084 U1_I2.2@33.62,43.425 ; C1_Input2.2@36.6,43.425 U1_I2.2@34.279,43.425 ; U1_I2.2@33.62,43.425 U1_I2.2@34.279,43.425 ; U1_I2.2@33.62,43.425 U1_I2.2@34.279,43.425
  Top Layer w0.381: XP1_Input2.1@29.9,40.275 29.9,41.55 30.55,42.2 33,42.2 33.575,42.775 33.575,44.039 33.62,44.084 34.279,43.425 C1_Input2.2@36.6,43.425
NetC1_Input3_2: C1_Input3.2 U1_I3.2 XP1_Input3.1 | length 13.7
  Top Layer w0.3: 45.479,43.425 C1_Input3.2@46.6,43.425
  Top Layer w0.381: XP1_Input3.1@39.9,40.275 39.9,41.85 40.225,42.175 43.05,42.175 43.62,42.745 43.62,44.084 U1_I3.2@44.279,43.425 ; U1_I3.2@44.279,43.425 C1_Input3.2@46.6,43.425 U1_I3.2@44.279,43.425
NetC1_Input4_2: C1_Input4.2 U1_I4.2@53.62,44.175 XP1_Input4.1 | length 10.3
  Top Layer w0.381: XP1_Input4.1@49.9,40.275 49.9,41.7 50.475,42.275 53.225,42.275 53.62,42.67 U1_I4.2@53.62,44.084 ; U1_I4.2@53.62,44.175 U1_I4.2@53.62,44.084 ; C1_Input4.2@56.6,43.425 54.279,43.425 U1_I4.2@53.62,44.084
NetC1_Input5_2: C1_Input5.2 U1_I5.2 XP1_Input5.1 | length 13.7
  Top Layer w0.3: 65.469,43.425 C1_Input5.2@66.6,43.425
  Top Layer w0.381: XP1_Input5.1@59.9,40.275 59.9,41.825 60.3,42.225 63.05,42.225 63.62,42.795 63.62,44.084 U1_I5.2@64.279,43.425 ; U1_I5.2@64.279,43.425 C1_Input5.2@66.6,43.425 U1_I5.2@64.279,43.425
NetC1_Input6_2: C1_Input6.2 U1_I6.2 XP1_Input6.1 | length 13.6
  Top Layer w0.3: 75.477,43.425 C1_Input6.2@76.6,43.425
  Top Layer w0.381: XP1_Input6.1@69.9,40.275 69.9,41.625 70.55,42.275 73.175,42.275 73.6,42.7 73.6,44.064 73.62,44.084 U1_I6.2@74.28,43.425 ; U1_I6.2@74.28,43.425 C1_Input6.2@76.6,43.425 U1_I6.2@74.28,43.425
NetC1_Input7_2: C1_Input7.2 U1_I7.2 XP1_Input7.1 | length 13.6
  Top Layer w0.3: 85.484,43.425 C1_Input7.2@86.6,43.425
  Top Layer w0.381: XP1_Input7.1@79.9,40.275 79.9,41.775 80.375,42.25 83.1,42.25 83.575,42.725 83.575,44.039 83.62,44.084 U1_I7.2@84.279,43.425 ; U1_I7.2@84.279,43.425 C1_Input7.2@86.6,43.425 U1_I7.2@84.279,43.425
NetC1_Input8_2: C1_Input8.2 U1_I8.2 XP1_Input8.1 | length 7.2
  Top Layer w0.381: C1_Input8.2@18.1,15.075 20.421,15.075 21.08,14.416 U1_I8.2@21.08,14.327 21.08,16.545 XP1_Input8.1@19.9,17.725
NetC1_Input9_2: C1_Input9.2 U1_I9.2 XP1_Input9.1 | length 7.1
  Top Layer w0.3: C1_Input9.2@28.1,15.075 29.21,15.075 U1_I9.2@30.42,15.075
  Top Layer w0.381: XP1_Input9.1@29.9,17.725 31.08,16.545 U1_I9.2@31.08,14.416 ; U1_I9.2@30.42,15.073 U1_I9.2@31.08,14.414